# Altium PCB control_circuit.PcbDoc (part 3 of 3)
Units mil, origin at the board's own origin, x right, y up, seen from the top; angles counter-clockwise.
Board outline 3202 x 1176 mil, 2 copper layers (Top Layer, Bottom Layer); 71 components, 80 nets, 328 pads, 216 vias.
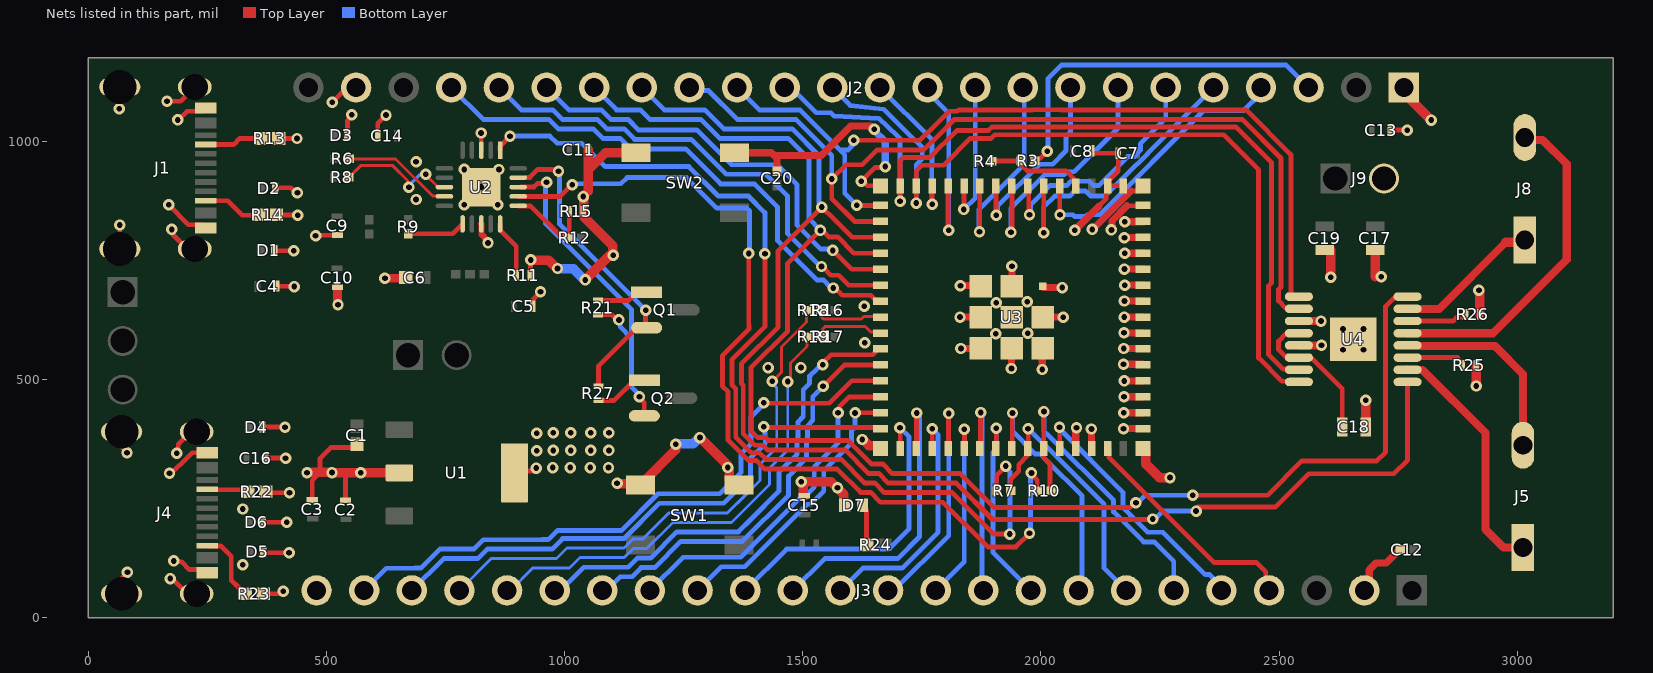
[diagram p2: the nets of this part, all layers, seen from the top]

## Via types
v1: diameter 24, hole 12, Top Layer to Bottom Layer, 216 vias

## Nets (pads, with @x,y where several pads share a name; then routed paths per layer and width w, separated by ;. In a path a pad name is that pad's centre, name@x,y a point inside that pad or via, vN(x,y) a via of type N, cw(c..) or ccw(c..) an arc to the next point about the centre after c; other vN are vias at no path point) (continued)
"CON GPIO0": J2.3 R3.2 | length 767.9
  Top Layer w10: R3.2@1987.03,959.5 1990.89,963.36 1997.57,963.36 v1(2013.21,979) v1@2012.11,977.89
  Bottom Layer w10: v1(2013.21,979) 2015,980.79 2015,1132.47 2042.53,1160 2515,1160 J2.3@2562,1113
CON_ESP_USB_N: J3.21 R18.1 | length 1131.8
  Top Layer w6.03: v1(1436,496) 1455,515 1455,540 ; 1455,540.24 1455,567.98 1490.84,603.81 ; 1490.84,603.84 1508,621 R18.1@1508,645
  Bottom Layer w6.03: J3.21@779,57 846,124 983,124 1005,146 1124.41,146 1143.41,165 1163.96,165 1218.96,220 1342,220 1362,240 1362.21,240 1410,287.79 1410,322 1445.18,357.18 1445.18,482.08 1436,491.26 v1(1436,496)
CON_ESP_USB_P: J3.20 R19.1 | length 986.3
  Top Layer w6.03: v1(1468.31,495.64) 1468.31,500.5 1474.13,506.33 1474.13,513.15 1473.99,513.3 1473.99,534.51 1508.47,569 R19.1@1508.47,590
  Bottom Layer w6.03: J3.20@879,57 886.14,57 933.14,104 1010,104 1032,126 1124.96,126 1143.96,145 1172.25,145 1227.25,200 1350.5,200 1430,279.5 1430,313.72 1468.31,352.02 v1(1468.31,495.64)
DTR_FTDI: Q2.2 R21.2 U2.18 | length 732.6
  Top Layer w10: U2.18@908,904.31 935.42,904.31 942.42,911.32 959.32,911.32 v1(962,914) ; R21.2@1070,636.24 1098.98,636.24 1110.21,625 v1(1114,625) ; v1(1157,464) 1157,460.86 1167.22,450.65 Q2.2@1167.22,423.6
  Bottom Layer w10: v1(962,914) 960,912 960,827.17 1140.08,647.08 1140.08,586.92 ; v1(1114,625) 1116.68,622.32 1116.68,610.32 1140.08,586.92 ; v1(1157,464) 1157,467.79 1140.08,484.7 1140.08,586.92
ESP_USB_N: R16.1 R18.2 U3.23 | length 149.5
  Top Layer w6.23: R16.1@1538.98,645 R16.1@1538,645 1538,632 1542.97,627.03 1623.03,627.03 1628,632 1662.41,632 U3.23@1663.37,631.04 U3.23@1659.36,627.03
ESP_USB_P: R17.1 R19.2 U3.24 | length 146.5
  Top Layer w6.23: R17.1@1538.47,590 1540.55,592.04 1540.55,604.55 1547,611 1631,611 1641.93,600.07 1660.87,600.07 U3.24@1663.37,597.57
FTD1_USB_N: R6.1 U2.9 | length 232.2
  Top Layer w6.23: R6.1@548,963 645,963 723.05,884.95 746.98,884.95 U2.9@747.62,884.31
FTD1_USB_P: R8.1 U2.8 | length 260.1
  Top Layer w6.23: R8.1@547,925 547.98,925 571.75,948.77 639.11,948.77 670.12,917.75 670.12,906.73 v1(673,903.86) ; v1(708.53,930.7) 708.53,929.41 733.94,904 U2.8@747.62,904
  Bottom Layer w6.23: v1(673,903.86) 673,906.73 676,909.73 696.97,930.7 v1(708.53,930.7)
GND: C1.1 C2.1 C3.1 C4.1 C5.1 C6.1 C7.1 C8.1 C9.1 C10.1 C11.1 C12.2 C13.1 C14.1 C15.1 C16.1 C17.1 C18.2 C19.1 C20.2 D1.1 D2.1 D3.1 D4.1 D5.1 D6.1 D7.2 J1.A1B12 J1.B1A12 J1.S1 J1.S2 J1.S3 J1.S4 J2.1 J2.23 J3.2 J3.24 J4.A1B12 J4.B1A12 J4.S1 J4.S2 J4.S3 J4.S4 J9.2 R11.1 R13.1 R14.1 R15.1 R22.1 R23.1 R25.2 R26.2 SW1.3 SW1.4 SW2.3 SW2.4 U1.2 U1.4 U2.3 U2.13 U2.21 U3.1 U3.2 U3.42 U3.43 U3.46 U3.47 U3.48 U3.49 U3.50 U3.51 U3.52 U3.53 U3.54 U3.55 U3.56 U3.57 U3.58 U3.59 U3.60 U3.61 U3.62 U3.63 U3.64 U3.65 U3.66 U3.67 U3.68 U3.69 U3.70 U3.71 U3.72 U3.73 U4.11 U4.13 U4.17 | length 6279.9
  Top Layer w10: v1(64.69,1068.33) 66,1069.63 J1.S3@66,1114.16 ; v1(65.74,824.33) 66,824.07 J1.S4@66,774 ; J4.S4@69.88,50.08 69.88,82.68 82,94.79 v1(82,95) ; J4.S3@69.88,390.24 69.88,357.2 v1(81.05,346.03) ; v1(165.09,1084.22) 193.54,1084.22 J1.S1@223.48,1114.16 ; v1(168.5,866.6) 210.2,824.91 239.31,824.91 J1.B1A12@246.12,818.09 ; v1(170.3,302.94) 174.09,302.94 190.91,319.76 191.76,319.76 218.14,346.14 J4.A1B12@250,346.14 ; v1(172,82) 175.79,82 207.71,50.08 J4.S2@227.36,50.08 ; v1(175,815) 177.68,812.32 177.68,804.19 207.87,774 J1.S2@223.48,774 ; v1(179,119) 180.59,117.41 195.59,117.41 212.14,100.86 243.31,100.86 J4.B1A12@250,94.17 ; v1(185.85,345.34) 188.53,348.02 188.53,364.27 214.49,390.24 J4.S1@227.36,390.24 ; v1(187.37,1044.99) 189.03,1044.99 207.29,1063.25 239.31,1063.25 J1.A1B12@246.12,1070.06 ; D4.1@365,400 v1(412.77,399.98) ; D6.1@365.59,200 v1(416.27,200) ; R23.1@367.32,50 403.91,50 v1(409.16,55.25) ; D5.1@367.32,138 369.21,136.11 v1(421.41,136.11) ; C16.1@371.81,335 413.64,335 v1(413.98,334.66) ; R22.1@372,264 373.83,262.17 v1(422.33,262.17) ; D1.1@390,771 390.5,770.5 430.5,770.5 v1(431,770) ; D2.1@392,902 393.39,902 393.89,902.5 424.71,902.5 435.21,892 v1(439,892) ; C4.1@395,696 395.5,695.5 431.5,695.5 v1(432,695) ; R14.1@395,846 395.5,845.5 438.81,845.5 v1(439.31,845) ; R13.1@400,1006 v1(438,1006) ; C3.1@470,247 470,288.43 486.57,305 486.57,334.57 509,357 557,357 C1.1@564,364 C1.1@563.5,364.5 ; v1(477,802) 477.61,802.61 522.25,802.61 C9.1@522.86,803.21 ; v1(512.2,1082.34) 542.86,1113 J2.23@562,1113 ; C2.1@540.91,245.59 C2.1@540,246.5 540,303 541.5,304.5 ; D3.1@543.8,1013 543.8,1043.01 553,1052.21 v1(553,1056) ; C14.1@607.5,1011 607.5,1037.81 v1(624.88,1055.19) ; v1(824.51,1017.45) 825,1016.96 U2.3@825,981.38 ; v1(825,904) 861.88,940.88 v1(862,940.88) ; U1.4@886,308 U1.4@901.13,308 ; U1.4@901.13,304 U1.4@901.13,308 ; U1.4@901.13,311.68 U1.4@901.13,308 ; R11.1@928,719 928.46,719.46 928.46,750.47 v1(928.91,750.93) ; C5.1@933,654 933,667.82 v1(949.3,684.12) ; v1(940.51,314.06) 934.45,308 U1.4@901.13,308 ; v1(1622.89,916.36) 1651.8,945.28 v1@1671.28,945.28 ; v1@1625.48,916.36 1635.21,906.63 U3.63@1663.37,906.63 ; U3.72@1865.55,631 U3.72@1867.41,629.14 ; C8.1@2106.5,980 2106.5,975.91 2107.4,975 C7.1@2162.5,975 2162.5,937.26 2139.63,914.39 U3.2@2139.63,906.63 ; 2122.24,864.45 2136.87,879.08 2136.87,903.76 U3.2@2139.75,906.63 U3.1@2173.21,906.63 ; 2180.65,864.65 2215.38,864.65 U3.60@2215.55,864.82 ; 2188.88,895.88 2203.8,895.88 U3.62@2214.55,906.63 ; J3.2@2679,57 J3.2@2689.33,67.33 ; C13.1@2734,1024 2768.33,1024 v1(2768.8,1023.53) ; C12.2@2753.25,143 C12.2@2754.1,143 ; J2.1@2762,1101.79 J2.1@2762,1113
  Top Layer w13: U2.13@825,826.62 825.41,826.21 825.41,804.91 831.9,798.43 831.9,796.81 839,789.71 v1(839,786.73)
  Top Layer w15: SW2.3@1356.69,975.98 1434.39,975.98 1440.2,970.18 ; C20.2@1446,937 1446,964.38 1440.2,970.18 ; v1(1649.79,1025.09) 1642.89,1032 1600.75,1032 1538.93,970.18 1440.2,970.18 ; v1@1671.28,945.28 v1(1673,947) ; v1(1830,631) U3.72@1865.55,631 ; v1@1830.14,697.14 U3.71@1871.41,697.14 ; v1@1831.14,565.14 U3.73@1872.41,565.14 ; v1@1937.86,522.14 U3.70@1937.86,563.41 ; U3.69@1939.14,697.59 v1@1939.14,738.86 ; v1@2002.86,520.14 U3.68@2002.86,561.41 ; U3.66@2004.59,692.86 v1@2045.86,692.86 ; U3.67@2005.59,630.86 v1(2046.86,630.86) ; v1(2071.09,813.29) 2122.24,864.45 ; U3.42@2072.82,355.45 2073.19,355.82 2073.19,397.03 v1(2074.71,398.55) ; v1@2106,397 2106.14,396.86 2106.14,355.59 U3.43@2106.28,355.45 ; v1(2108,815) 2188.88,895.88 ; v1(2148,814) 2149,815 2149,833 2180.65,864.65 ; v1@2173.14,430.14 U3.47@2214.41,430.14 ; v1@2173.14,565.14 U3.51@2214.41,565.14 ; v1(2173.34,396.82) U3.46@2214.55,396.82 ; v1(2173.34,531.82) U3.50@2214.55,531.82 ; v1@2174.14,497.14 U3.49@2215.41,497.14 ; v1@2174.14,631.14 U3.53@2215.41,631.14 ; v1(2174.34,463.82) U3.48@2215.55,463.82 ; v1(2174.34,597.82) U3.52@2215.55,597.82 ; v1@2175.14,698.14 U3.55@2216.41,698.14 ; v1@2175.14,765.14 U3.57@2216.41,765.14 ; v1@2175.14,831.14 U3.59@2216.41,831.14 ; v1(2175.34,664.82) U3.54@2216.55,664.82 ; v1(2175.34,731.82) U3.56@2216.55,731.82 ; v1(2175.34,797.82) U3.58@2216.55,797.82 ; J3.2@2689.33,67.33 2689.33,100.33 2704,115 2725.25,115 C12.2@2753.25,143
  Top Layer w17: U4.13@2541.48,571.55 v1@2588.81,571.55 ; U4.11@2541.48,622.73 v1@2587.82,622.73
  Top Layer w18: C10.1@523,693.5 523,657.9 v1(524.16,656.73) ; v1(622.67,712.58) 664.89,712.58 C6.1@666.32,714
  Top Layer w20: v1(459,304) 459.77,304.77 480.77,304.77 481,305 486.57,305 511,305 v1(511.5,304.5) 541.5,304.5 571.5,304.5 v1(572,304) U1.2@652.87,304 U1.2@652.37,303.5 ; v1(928.91,750.93) 929.68,750.16 966.75,750.16 983.92,733 v1(985,733) ; v1(1043,709) 1094.31,760.31 1101.07,760.31 1101.31,760.08 1101.31,780.57 1039.77,842.11 1039.77,883.19 v1(1039,883.96) 1039,885.04 1049.5,895.54 1049.5,939.92 ; C11.1@1049.5,983 1049.5,939.92 ; v1(1110.08,282.06) 1110.84,281.3 1156,281.3 SW1.4@1158.93,278.36 1233,352.43 v1(1233,364) ; SW2.4@1150,975.98 1101.94,975.98 1101.89,975.94 1085.51,975.94 1049.5,939.92 ; v1(1284,378) 1341.95,320.05 1341.95,316.02 v1(1342.71,315.25) 1342.71,314.17 1345.11,311.77 1345.11,288.05 1354.8,278.36 SW1.3@1365.62,278.36 ; SW2.3@1356.69,975.98 SW2.3@1358.71,978 ; C15.1@1503,256 1501.19,257.81 1501.19,279.73 1497,283.92 v1(1497,285) 1559.73,285 1571.83,272.91 v1(1572.91,272.91) 1572.91,271.83 1586.19,258.54 1586.19,237.81 D7.2@1588,236 ; v1(1625,374) 1626.08,374 1638.89,361.2 1657.62,361.2 U3.64@1663.37,355.45 ; U3.65@2214.55,355.45 2220.3,349.7 2220.3,322.4 2248.7,294 v1(2271,294) ; v1@2587.82,622.73 v1(2587.95,622.6) ; v1@2588.81,571.55 v1(2589.06,571.81) ; C19.1@2608.65,772.13 2608.65,715.01 v1(2608.75,714.91) ; C18.2@2681.65,400.35 2681.65,455.94 v1(2682.11,456.4) ; 2701.58,715.36 2702,715.78 C17.1@2702,772 ; J2.1@2762,1101.79 v1(2819.18,1044.61) ; v1(2913.75,486.33) 2914,486.58 R25.2@2914,530 ; v1(2919.58,687.4) 2921,685.99 R26.2@2921,637
  Bottom Layer w10: v1(185.85,345.34) v1@185.85,348.72 ; J2.23@551.67,1102.67 J2.23@562,1113
  Bottom Layer w15: v1(1649.79,1025.09) 1649.79,1022.71 1673,999.51 v1(1673,947)
  Bottom Layer w20: v1(985,733) 985.77,732.23 1018.68,732.23 1041.92,709 v1(1043,709) ; v1(1233,364) 1233.77,364.77 1269.68,364.77 1282.92,378 v1(1284,378)
  other v1: 324,111 324,228 975,315 1012,315 1054,315 1092,315 941.51,350.06 976,351 1013,351 1055,351 1093,351 941.51,387.06 976,388 1013,388 1055,388 1093,388 2106,396 2174,430 2175,497 2003,521 1938,523 1427,525 1496,525 2634,562.69 2677.31,562.69 1832,565 2174,565 1630,577 1905,596 1972,597 2634,606 2677.31,606 2175,631 1629,654 1906,661 1971,663 2045,693 1831,697 2176,698 2714.24,715.71 1939,738 1102.07,761.07 2176,765 2176,831 789,867 859.61,866.69 688.05,877.91 789,941 688,957
GPIO0: R3.1 R4.1 U3.4 | length 192.8
  Top Layer w10: 1907.75,958.75 1956.75,958.75 R3.1@1957.5,959.5 ; R3.1@1962.34,955.64 1962.34,947.1 1971.8,937.64 2002.25,937.64 2002.61,938 2052.82,938 2069.94,920.87 2069.94,909.5 U3.4@2072.82,906.63
GPIO1: J2.4 U3.5 | length 603.9
  Top Layer w10: U3.5@2039.35,906.63 2039.68,906.31 2039.68,846.32 v1(2040,846)
  Bottom Layer w10: v1(2040,846) 2067.05,846 2071.11,841.94 2093.48,841.94 2097.54,846 2123.28,846 2341.28,1064 2425,1064 2462,1101 J2.4@2462,1113
GPIO2: J2.5 U3.6 | length 622.5
  Top Layer w10: U3.6@2005.89,906.63 2005.94,906.57 2005.94,808.06 v1(2006,808)
  Bottom Layer w10: v1(2006,808) 2006,862.18 2028.82,885 2060.17,885 2071.11,895.94 2093.48,895.94 2104.42,885 2134,885 2200.92,951.92 2202.09,951.92 2224.93,974.77 2224.93,975.93 J2.5@2362,1113
GPIO3: J2.6 U3.7 | length 522.8
  Top Layer w10: U3.7@1972.43,906.63 1974.21,904.84 1974.21,847.79 v1(1976,846)
  Bottom Layer w10: v1(1976,846) 1978.68,848.68 1978.68,866.93 2018.74,907 2053.89,907 2062.83,915.94 2101.76,915.94 2110.7,907 2121,907 2181.92,967.92 2195.46,967.92 2208.93,981.4 2208.93,994.93 2262,1048 J2.6@2262,1113
GPIO4: J2.7 U3.8 | length 528.6
  Top Layer w10: v1(1937,809) 1938.96,810.96 U3.8@1938.96,906.63
  Bottom Layer w10: v1(1937,809) 1937,859.18 2007.82,930 2048.6,930 2054.54,935.94 2069.95,935.94 2162,1027.99 J2.7@2162,1113
GPIO5: J2.8 U3.9 | length 410.5
  Top Layer w10: U3.9@1905.5,906.63 1905.75,906.38 1905.75,845.25 v1(1906,845)
  Bottom Layer w10: v1(1906,845) 1908.68,847.68 1908.68,863.6 1997.07,952 2024.39,952 2052.61,980.22 2052.61,1009.62 2062,1019 J2.8@2062,1113
GPIO6: J2.9 U3.10 | length 441
  Top Layer w10: v1(1871,810) 1871.52,810.52 1871.52,906.11 U3.10@1872.03,906.63
  Bottom Layer w10: v1(1871,810) 1870.1,810.9 1870.1,857.12 1965,952.02 1965,1110 J2.9@1962,1113
GPIO7: J2.10 U3.11 | length 315.8
  Top Layer w10: v1(1838,857) 1838.28,857.28 1838.28,906.35 U3.11@1838.57,906.63
  Bottom Layer w10: v1(1838,857) 1862,881 J2.10@1862,1113
GPIO8: J2.11 U3.12 | length 412.4
  Top Layer w10: U3.12@1805.1,906.63 1805.1,814.4 v1(1806.42,813.08)
  Bottom Layer w10: J2.11@1762,1113 1762,1102.96 1806.42,1058.54 v1(1806.42,813.08)
GPIO9: J2.12 U3.13 | length 329.6
  Top Layer w10: U3.13@1771.64,906.63 1771.77,906.5 1771.77,867.99 v1(1771.9,867.86)
  Bottom Layer w10: J2.12@1662,1113 1770.95,1004.05 1770.95,995.52 1771,995.47 1771,956.53 1770.95,956.48 1770.95,868.81 v1(1771.9,867.86)
GPIO10: J2.13 U3.14 U4.16 | length 1709.6
  Top Layer w10: v1(1738,870.41) 1738.17,870.58 U3.14@1738.17,906.63 1738.17,938.17 1750,950 1795.5,950 1851.5,1006 1895.48,1006 1903.4,1013.92 2383.39,1013.92 2456.91,940.4 2456.91,545.15 2505.81,496.26 2540,496.26 U4.16@2541.48,494.78
  Bottom Layer w10: J2.13@1562,1113 1597.07,1077.93 1597.52,1077.48 1600,1075 1669.79,1067.21 1734,1003 1735.18,1003 1751,987.18 1751,963.82 1738,950.82 v1(1738,870.41)
GPIO11: J2.14 U3.15 U4.15 | length 1823.6
  Top Layer w10: v1(1704.23,874.36) 1705.01,875.14 1704.71,875.44 U3.15@1704.71,906.63 1704.71,960.14 1710.57,966 1766.28,966 1794.28,994 1794.85,994 1823.85,1023 1889.85,1023 1896.77,1029.92 2410.08,1029.92 2484.01,955.99 2484.01,702.35 2477.65,695.99 2477.65,552.69 2508.5,521.85 2540,521.85 U4.15@2541.48,520.37
  Bottom Layer w10: J2.14@1462,1113 1475.26,1113 1528.26,1060 1559,1060 1563.07,1055.93 1566,1053 1659.32,1048.09 1698.37,1011.63 1704.23,1005.77 v1(1704.23,874.36)
GPIO12: J2.15 U3.16 U4.9 | length 1779.3
  Top Layer w10: v1(1606.91,1002.09) 1745.81,1002.09 1777.72,1034 1778.28,1034 1807.28,1063 1824.33,1063 1827.33,1066 1981.47,1066 1981.53,1066.06 2042.47,1066.06 2042.53,1066 2431,1066 2523.84,973.16 ; v1(1613.02,865.52) 1612.91,865.42 1613.04,865.29 U3.16@1663.37,865.29 ; 2525.01,971.99 2525.01,676.48 2528.58,672.91 U4.9@2531.48,672.91
  Bottom Layer w10: J2.15@1362,1113 1409,1066 1493.97,1066 1578,981.97 ; v1(1606.91,1002.09) 1604.23,999.41 1604.23,991.23 1594.97,981.97 1578,981.97 ; v1(1613.02,865.52) 1588,890.54 1588,971.97 1578,981.97
GPIO13: J2.16 U3.17 U4.10 | length 1939.1
  Top Layer w10: U3.17@1663.37,831.83 1608.53,831.83 1561,879.36 v1(1561,921) 1591,951 1625,951 1656,982 1754,982 1786,1014 1786.57,1014 1818.49,1045.92 2422.36,1045.92 2504.01,964.27 2504.01,694.06 2498.95,689 2498.95,664.86 2514.01,649.8 2529,649.8 U4.10@2530,648.8
  Bottom Layer w10: J2.16@1262,1113 1268.47,1106.53 1302,1106.53 1362.53,1046 1485.69,1046 1561,970.69 v1(1561,921)
GPIO14: J2.17 U3.18 U4.1 | length 2926.7
  Top Layer w10: U3.18@1663.37,798.36 1603.77,798.36 1566.14,835.99 1565.97,835.99 1540.13,861.83 v1(1540.05,862) v1(1540.05,862) 1448,769.95 1448,610 1371.18,533.18 1371.18,491.41 1375.18,487.41 1375.18,385.7 1398.88,362 1415.62,362 1425.62,352 1560.28,352 1588.65,352 1637.87,302.78 1659.17,302.78 1679.5,282.45 1821.83,282.45 1898.28,206 2234,206 v1(2235,207) ; v1(2325.67,223.66) 2325.67,226.33 2325,227 2330,232 2492,232 2562,302 2741,302 2769.83,330.83 U4.1@2769.83,494.78
  Bottom Layer w10: J2.17@1162,1113 1209,1066 1294,1066 1334,1026 1477.4,1026 1534,969.4 1534,871.83 1540.05,865.79 v1(1540.05,862) ; v1(2235,207) 2238.79,207 2255.45,223.66 v1(2325.67,223.66)
GPIO15: J2.18 U3.19 U4.8 | length 3108.1
  Top Layer w10: U3.19@1663.37,764.9 1607.29,764.9 1572.94,799.24 1554.55,799.24 1540.79,813 v1(1537,813) 1468,744 1468,601.72 1391.18,524.9 1391.18,392.33 1405.51,378 1422.25,378 1428.25,372 1568.57,372 1594.47,372 1643.69,322.78 1667.45,322.78 1687.78,302.45 1830.12,302.45 1901.57,231 2186.58,231 2197.02,241.44 v1(2199.44,241.44) ; v1(2319,257) 2476,257 2548,329 2705,329 2723.68,347.68 2723.68,653.76 2742.36,672.44 2768.35,672.44 U4.8@2769.83,673.91
  Bottom Layer w10: J2.18@1062,1113 1109,1066 1159,1066 1179,1046 1285.72,1046 1325.72,1006 1469.12,1006 1513.05,962.07 1513.05,836.95 v1(1537,813) ; v1(2199.44,241.44) 2203.23,241.44 2218.79,257 v1(2319,257)
GPIO16: J2.19 U3.20 | length 909.3
  Top Layer w10: v1(1563,771) 1602.57,731.43 U3.20@1663.37,731.43
  Bottom Layer w10: J2.19@962,1113 1009,1066 1077,1066 1097,1046 1133,1046 1155,1024 1277,1024 1350.34,950.66 1446.34,950.66 1488,909 1488,823.82 1538.14,773.68 1560.32,773.68 v1(1563,771)
GPIO17: J2.20 U3.21 | length 1019.7
  Top Layer w10: v1(1539.23,737.23) 1540.55,737.23 1558.79,719 1575.18,719 1596.22,697.97 U3.21@1663.37,697.97
  Bottom Layer w10: J2.20@862,1113 909,1066 975,1066 995,1046 1068.72,1046 1088.72,1026 1124.72,1026 1146.72,1004 1266,1004 1339.34,930.66 1422.54,930.66 1468,885.19 1468,806 1536.77,737.23 v1(1539.23,737.23)
GPIO18: J2.21 U3.22 | length 1128.6
  Top Layer w10: v1(1564,692) 1567.79,692 1582.79,677 1642.53,677 1652.15,667.38 1660.5,667.38 U3.22@1663.37,664.5
  Bottom Layer w10: J2.21@762,1113 829,1046 966.72,1046 986.72,1026 1060.43,1026 1080.43,1006 1116.43,1006 1138.43,984 1254,984 1327.34,910.66 1398.34,910.66 1447,862 1447,791.28 1529.28,709 1543.21,709 1560.21,692 v1(1564,692)
GPIO21: J3.19 U3.25 | length 1002.8
  Top Layer w10: v1(1542.09,530.91) 1542.09,534.7 1559.31,551.91 1646.76,551.91 1652.62,557.77 1652.62,561.24 1655.5,564.11 U3.25@1663.37,564.11
  Bottom Layer w10: J3.19@979,57 991.28,57 1040.28,106 1133.25,106 1152.25,125 1180.53,125 1235.53,180 1364.72,180 1390.72,206 1450,265.28 1450,305.43 1488,343.43 1488,375.72 1490,377.72 1490,411.25 1501,422.25 1501,478.82 1514.16,491.98 1514.16,507.16 1521.09,514.09 1521.48,514.09 1538.3,530.91 v1(1542.09,530.91)
GPIO26: J3.18 U3.26 | length 871.9
  Top Layer w10: v1(1542.59,485.59) 1587.65,530.65 U3.26@1663.37,530.65
  Bottom Layer w10: J3.18@1079,57 1087.47,57 1116.47,86 1141.53,86 1160.53,105 1188.82,105 1243.82,160 1373,160 1470,257 1470,297.15 1508,335.15 1508,367.43 1510,369.43 1510,402.96 1521,413.96 1521,464 v1(1542.59,485.59)
GPIO33: J3.17 U3.28 | length 720.9
  Top Layer w10: v1(1574,430) 1576.68,432.68 1576.68,442.68 1597.36,463.36 1663.01,463.36 U3.28@1663.37,463.72
  Bottom Layer w10: J3.17@1179,57 1248.67,126.67 1369.38,126.67 1500.72,258 1508.18,258 1524,273.82 1524,316.71 1574,366.71 v1(1574,430)
GPIO34: J3.16 U3.29 | length 596.7
  Top Layer w10: v1(1609.68,429.68) 1610.24,430.25 U3.29@1663.37,430.25
  Bottom Layer w10: J3.16@1279,57 1328.67,106.67 1377.67,106.67 1509,238 1516.47,238 1544,265.53 1544,308.43 1602,366.43 1602,392.32 1609.68,400 v1(1609.68,429.68)
GPIO35: J3.15 U3.31 | length 660.7
  Top Layer w10: U3.31@1704.35,354.45 v1@1704.35,397.97
  Bottom Layer w10: J3.15@1379,57 1466,144 1680,144 1723,187 1723,379.42 v1(1703.94,398.49)
GPIO36: J3.14 U3.32 | length 651.6
  Top Layer w10: U3.32@1738.89,352.45 v1@1738.89,429.21
  Bottom Layer w10: J3.14@1479,57 1546,124 1699,124 1745,170 1745,420.17 1739.32,425.85 v1(1739.32,429.64)
GPIO37: J3.13 U3.33 | length 522.3
  Top Layer w10: v1(1772,396.49) 1771.82,396.31 1771.82,352.98 U3.33@1772.35,352.45
  Bottom Layer w10: J3.13@1579,57 1626,104 1709,104 1784,179 1784,383.63 1772,395.63 v1(1772,396.49)
GPIO38: J3.12 U3.34 | length 508.3
  Top Layer w10: U3.34@1805.89,351.45 v1@1805.89,428.21
  Bottom Layer w10: J3.12@1679,57 1691.28,57 1806.32,172.04 v1(1806.32,428.64)
GPIO39: J3.11 U3.35 | length 406.8
  Top Layer w10: U3.35@1839.35,351.45 v1@1839.35,394.97
  Bottom Layer w10: J3.11@1779,57 1838.94,116.94 v1(1838.94,395.49)
GPIO40: J3.10 U3.36 | length 452.7
  Top Layer w10: U3.36@1872.89,353.45 v1@1872.89,430.21
  Bottom Layer w10: v1(1873.32,430.64) 1876,427.96 1876,60 J3.10@1879,57
GPIO41: J3.9 U3.37 | length 419.4
  Top Layer w10: U3.37@1906.35,353.45 v1@1906.35,396.97
  Bottom Layer w10: v1@1905.94,397.02 1905.94,353.76 1899.18,347.01 1899.18,136.82 J3.9@1979,57
  other v1: 1905.94,397.49
GPIO42: J3.8 U3.38 | length 519.1
  Top Layer w10: U3.38@1939.89,352.45 v1@1939.89,429.21
  Bottom Layer w10: v1(1940.32,429.64) 1940.32,390.92 1987.44,343.8 1998.17,343.8 2012.46,329.51 2086.24,255.73 2086.24,64.24 J3.8@2079,57
GPIO45: J3.5 U3.41 | length 574.1
  Top Layer w10: v1(2038.94,399.49) 2039.41,399.02 2039.35,398.97 U3.41@2039.35,355.45 U3.41@2039.35,347.57 ; J3.5@2369,67 J3.5@2379,57
  Bottom Layer w10: v1(2038.94,399.49) 2038.94,396.14 2172.44,262.64 2172.44,230.25 2188.25,214.44 2188.38,214.44 2223.82,179 2256.08,179 2344.75,90.33 2354.15,90.33 2368.67,75.81 2368.67,67.33 J3.5@2379,57
GPIO46: J3.4 U3.44 | length 491.1
  Top Layer w10: U3.44@2139.75,355.45 2142.62,352.57 2142.62,336.44 2246.06,233 2246.18,233 2262,217.18 2262,217.06 2363.06,116 2452,116 2471.77,96.23 2471.77,64.23 J3.4@2479,57
GPIO47: J3.23 U3.27 | length 1325.2
  Top Layer w10: v1(1418.18,451) 1419.18,450 1555.72,450 1602.9,497.18 U3.27@1663.37,497.18
  Bottom Layer w10: J3.23@579,57 625.72,103.72 684.68,103.72 685.1,104.14 697.86,104.14 737.72,144 809.43,144 829.15,163.72 952.68,163.72 952.96,164 965.43,164 984.32,182.89 1118.85,182.89 1195.96,260 1325.43,260 1347.61,282.18 1347.82,282.18 1370,304.36 1370,342.57 1391.18,363.75 1391.18,421.18 1418.18,448.18 v1(1418.18,451)
GPIO48: J3.22 U3.30 | length 1175.9
  Top Layer w10: v1(1418.18,401) 1420.29,398.89 1661.26,398.89 U3.30@1663.37,396.79
  Bottom Layer w10: J3.22@679,57 746,124 817.72,124 837.72,144 973.72,144 995.72,166 1124.59,166 1198.59,240 1333.72,240 1355.89,262.18 1356.11,262.18 1390,296.07 1390,334.28 1421,365.28 1421,375.28 1420.86,375.42 1420.86,398.32 v1(1418.18,401)
"MOTOR A+": J5.1 U4.2 | length 515.8
  Top Layer w17: U4.2@2769.83,520.37 2769.96,520.23 2791.14,520.23 2791.24,520.14 2801,520.14 2933,388.14 2933,185 2971,147 J5.1@3012,147
"MOTOR A-": J5.2 U4.4 | length 387.4
  Top Layer w17: U4.4@2798.13,570.14 2802.18,570.14 2802.32,570 2953,570 3012,511 J5.2@3012,362
"MOTOR B+": J8.1 U4.7 | length 306.1
  Top Layer w17: U4.7@2769.83,648.32 2836.32,648.32 2976,788
  Top Layer w20: 2976,788 3011,788 J8.1@3016,793
"MOTOR B-": J8.2 U4.5 | length 709.8
  Top Layer w15: J8.2@3016,1008 J8.2@3020.82,1003.18
  Top Layer w17: U4.5@2769.83,597.14 2949.14,597.14 3104,752 3104,952.52 3053.34,1003.18 J8.2@3020.82,1003.18
NetC18_1: C18.1 U4.12 U4.14 | length 291.2
  Top Layer w10: U4.14@2530,546.44 2529,547.44 2514.01,547.44 2498.95,562.5 2498.95,580.61 2514.01,595.67 2531,595.67 U4.12@2531.48,596.14 ; U4.14@2542.96,544.48 2568.95,544.48 2632.44,480.99 C18.1@2632.44,400.35
NetD7_1: D7.1 R24.1 | length 86.6
  Top Layer w10: D7.1@1625.4,236 1625.4,234.03 1634,225.43 R24.1@1634,153
NetJ1_A5: J1.A5 R13.2 | length 121.5
  Top Layer w10: J1.A5@246.12,993.29 305.29,993.29 318,1006 R13.2@362.32,1006
NetJ1_B5: J1.B5 R14.2 | length 124.1
  Top Layer w10: J1.B5@246.12,875.18 292.82,875.18 323,845 356.32,845 R14.2@357.32,846
NetJ4_A5: J4.A5 R22.2 | length 86.5
  Top Layer w10: J4.A5@250,269.37 250.78,268.59 329.73,268.59 R22.2@334.32,264
NetJ4_B5: J4.B5 R23.2 | length 151.2
  Top Layer w10: J4.B5@250,151.26 250.78,150.48 278.02,150.48 300,128.5 300,78 307.07,70.93 307.86,70.93 328.79,50 R23.2@329.64,50
NetQ1_1: Q1.1 R21.1 | length 109.5
  Top Layer w10: R21.1@1070,665.76 1134.01,665.76 1151.65,683.4 Q1.1@1172.22,683.4
NetQ2_1: Q2.1 R27.1 | length 113.8
  Top Layer w10: R27.1@1071,456 1104.24,456 1146.65,498.4 Q2.1@1167.22,498.4
NetR9_2: R9.2 U2.11 | length 122.2
  Top Layer w10: R9.2@672,806 765.01,806 U2.11@785.63,826.62
NetR11_2: R11.2 U2.15 | length 121.7
  Top Layer w10: U2.15@864.37,826.62 864.37,813.35 898.47,779.24 R11.2@898.47,719
NetR25_1: R25.1 U4.3 | length 123.6
  Top Layer w10: U4.3@2769.83,545.96 2874.78,545.96 ; 2874.78,544.61 2884.47,534.92 R25.1@2884.47,530
NetR26_1: R26.1 U4.6 | length 130.4
  Top Layer w10: U4.6@2769.83,622.73 2865.57,622.73 2874.01,631.17 2890.57,631.17 2891.47,632.08 R26.1@2891.47,637
RTS_FTDI: Q1.2 R27.2 U2.19 | length 658.3
  Top Layer w10: U2.19@919.45,924.32 927.14,924.32 943.82,941 973.18,941 974.49,939.7 984.34,939.7 v1(987.02,937.02) ; R27.2@1071,485.53 1071,527.95 1151.65,608.6 Q1.2@1172.22,608.6 1170,610.81 v1(1170,645.45)
  Bottom Layer w10: v1(987.02,937.02) 989,935.04 989,826.45 v1(1170,645.45)
RXD_FTDI: R7.2 U2.1 | length 2009.8
  Top Layer w10: U2.1@864.37,981.38 864.37,990.11 v1(885.21,1010.96) ; v1(1420.54,764.02) 1420.54,610.83 1351.18,541.47 1351.18,488.78 1359.18,480.78 1359.18,379.07 1392.25,346 1408.99,346 1422.99,332 1580.28,332 1629.5,282.78 1650.88,282.78 1671.21,262.45 1813.55,262.45 1900.51,175.49 v1(1934.74,175.49) ; R7.2@1907,266 1907,299.07 v1(1926.18,318.25)
  Bottom Layer w10: v1(885.21,1010.96) 969.04,1010.96 984,996 1036,996 1085,947 1261,947 1323,885 1386,885 1420.54,850.46 v1(1420.54,764.02) ; v1(1926.18,318.25) 1926.18,314.47 1934.74,305.9 v1(1934.74,175.49)
TXD_FTDI: R10.2 U2.17 | length 1951.7
  Top Layer w10: U2.17@902.38,884.31 940.5,884.31 940.82,884 963.18,884 963.5,884.31 990.32,884.31 1015,909 v1(1016,909) ; v1(1386.55,764.67) 1386.55,614.45 1387,614 1387,605.57 1331.18,549.75 1331.18,486.15 1343.18,474.15 1343.18,372.44 1385.63,330 1402.37,330 1420.37,312 1572,312 1621.22,262.78 1642.6,262.78 1662.93,242.45 1794.24,242.45 1888.2,148.49 1947.49,148.49 v1(1976,177) ; v1(1979.98,303.8) 1979.98,300.61 1992.47,288.13 R10.2@1992.47,266
  Bottom Layer w10: v1(1016,909) 1018,911 1118,911 1131,924 1255.72,924 1319.72,860 1382,860 1388.24,853.76 1388.24,764.67 v1(1386.55,764.67) ; v1(1976,177) 1977.99,178.99 1977.99,301.81 v1(1979.98,303.8)
U0RXD: J3.6 R10.1 U3.40 | length 675.8
  Top Layer w10: v1(2006.32,432.64) 2005.89,432.21 U3.40@2005.89,355.45 2005.89,336.08 2019.02,322.94 2019.02,268.98 R10.1@2022,266
  Bottom Layer w10: v1(2006.32,432.64) 2006.32,391.39 2013.91,383.8 2014.74,383.8 2152.44,246.1 2152.44,221.97 2215.41,159 2238,159 2279,118 J3.6@2279,57
U0TXD: J3.7 R7.1 U3.39 | length 571.1
  Top Layer w10: R7.1@1937.51,266 R7.1@1936.53,266 1936.53,290.42 1953.18,307.07 1953.18,321.18 1972.43,340.43 U3.39@1972.43,355.45 ; U3.39@1973.35,355.45 v1@1973.35,395.97
  Bottom Layer w10: v1(1972.94,396.49) 2005.62,363.8 2006.45,363.8 2132.44,237.81 2132.44,103.56 J3.7@2179,57
VBUS_SENSE: R12.1 R15.2 U2.16 | length 186
  Top Layer w10: U2.16@903.99,863.96 929.04,863.96 991.63,801.37 1003.1,801.37 R12.1@1006.47,798 1009.47,801 R15.2@1009.47,853
pads on no net: J1.A8 J1.B8 J2.24 J4.A8 J4.B8 U2.2 U2.4 U2.5 U2.6 U2.7 U2.14

## Polygon pours and split planes (outlines as drawn)
+3V3 on Top Layer "+3V3_L01_P018" (solid, pour order 18): 1252,866 1227,866 1183,910 1183,1004 1184,1005 1101,1088 1101,1153 1126,1178 3201,1178 3201,0 2512.27,0 2512.27,106.34 2627.36,140.3 2629.74,282.11 2808.41,393.59 2805.27,734.3 2803.74,899.85 2699.59,1004 1307,1005 1225,1087 1225,1137 1217,1145 1216,1144 1198,1144 1198,1136.13 1195.45,1133.57 1197.31,1131.72 1197.31,1063.3 1200.71,1059.9 1200.09,1059.28 1200.09,1024.91 1224,1001 1224,942 1282,890 1282,874 1282,865
+3V3 on Top Layer "+3V3_L01_P017" (solid, pour order 17): 734,526 734,658 733,659 694,659 682,647 681,648 583,648 583,653 574,662 574,712 576.27,718.68 580.7,725.7 619,764 619,795 581,795 579.84,796.16 579.84,816.03 621.09,816.03 625.31,820.24 635.87,820.24 645.06,811.06 645.06,755.29 619.59,729.82 618.73,729.82 618.73,729.65 600.88,711.81 600.88,682.7 670.35,682.7 675.89,688.25 753.84,688.25 758.35,692.75 758.35,733.81 780.69,733.81 783.12,731.38 782.77,731.03 782.77,636.63 789.7,629.7 789.7,628.66 882.03,628.66 887.4,634.03 905.97,634.03 911,629 911,553 876,518 742,518
GND on Top Layer "GND_L01_P009" (solid, pour order 9): 1212,403 1105,403 1095,413 1090,416 1082,420 1037,465 1037,477 715,477 714,476 714,354.38 711.76,354.04 594,356 594,365 580,379 475,379 434,420 405,420 405,272 403,270 406,267 406,111 438,111 437,112 437,241 496,241 556,241 577,260 609,260 609,281 614.2,286.2 706,286.2 706,108 705,107 1115,107 1115,182 1125,192 1192,192 1192,194 1213,215 1212,216
GND on Top Layer "GND_L01_P008" (solid, pour order 8): 2055,750 1811,750 1808,753 1808,505 2054,505 2058,509 2058,751.5
+5V_BUS2 on Top Layer "+5V_BUS2_L01_P007" (solid, pour order 7): 35,435 276,435 305,406 305,382 347,382 351,378 351,510 38,510 35,513
+5V_BUS1 on Top Layer "+5V_BUS1_L01_P005" (solid, pour order 5): 40,638 376,638 376,743 377,744 376,745 347,745 347,739 326,718 38,718 38,639
+5V on Top Layer "+5V_L01_P004" (solid, pour order 4): 45,535 366,535 481,420 481,387 600,387 619,368 705,368 705,479 702,482 491,482 355,618 35,618 35,538 34,537
+3V3_REG on Top Layer "+3V3_REG_L01_P003" (solid, pour order 3): 674,147 495,147 495,154 466,183 444,183 444,230 443,231 446,234 578,234 587,243 625,243 625,279 628,282 630,280 684,280 684,194 682,192 682,155 675,148
+3V3_FTDI on Top Layer "+3V3_FTDI_L01_P002" (solid, pour order 2): 499,720 499,750 515,766 533,766 533,786 539,792 538,793 538,820 519,820 502,837 502,874 504,876 619,876 619,822 616,819 583,819 570,806 570,720
+3V3_FTDI on Top Layer "+3V3_FTDI_L01_P001" (solid, pour order 1): 1022,955.49 945,955.49 945,1025 1022,1025
GND on Bottom Layer "GND_L02_P016" (solid, pour order 16): 1,0 3202,0 3202,1176 3180,1176 1,1176

## Other copper
Top Layer:
  pour cut-out: 1520.81,244.09 1522.76,242.15 1571.35,242.15 1571.35,256.56 1558.57,269.34 1558.57,279.39 1572,292.82 1574.18,292.82 1574.18,297.51 1567.52,304.17 1514.13,304.17 1507.25,297.29 1511.4,293.14 1511.4,273.82 1517.51,267.7 1517.51,247.06 1521.01,243.57

## Silkscreen, mask and mechanical layers (free items; w line width, h text height)
Top Overlay:
  text "-" at 3087,987.01 h40
  text "+12V" at 2500,980 h30 r270
  text "GND" at 2780,960 h30 r270
  text "BOOT" at 1027,907 h30
  text "MOTOR B" at 2913,827 h30 r90
  text "+" at 3087,760.34 h40
  text "3V3REG" at 503.94,543.94 h15.75
  text "3V3" at 843.94,543.94 h20
  text "5V" at 160,540 h30
  text "-" at 3087,347.01 h40
  text "RESET" at 996.52,185.85 h30
  text "MOTOR A" at 2893,147 h30 r90
  text "+" at 3087,140.34 h40
Bottom Overlay:
  text "1" at 1087,627 h30
  text "ALEX EAGLES" at 2430,530 h170
Board Shape:
  lines w20: 0,0 0,1180 3200,1180 3200,0 0,0

## Text inside footprints (layer, text, board x,y; h text height)
J2: Bottom Overlay "1" at 2874,1106 h40
J3: Bottom Overlay "1" at 2874,46 h40
J6: Top Overlay "1" at -4,673 h40
J7: Top Overlay "1" at 686.74,447.45 h40 r90
J9: Top Overlay "1" at 2633.74,818.45 h40 r90